# Altium PCB PCB1.pcbdoc (part 3 of 3)
Units mil, origin at the board's own origin, x right, y up, seen from the top; angles counter-clockwise.
Board outline 3735 x 4815 mil, 4 copper layers (Top Layer, Inner1, Inner2, Bottom Layer); 129 components, 135 nets, 714 pads, 315 vias.
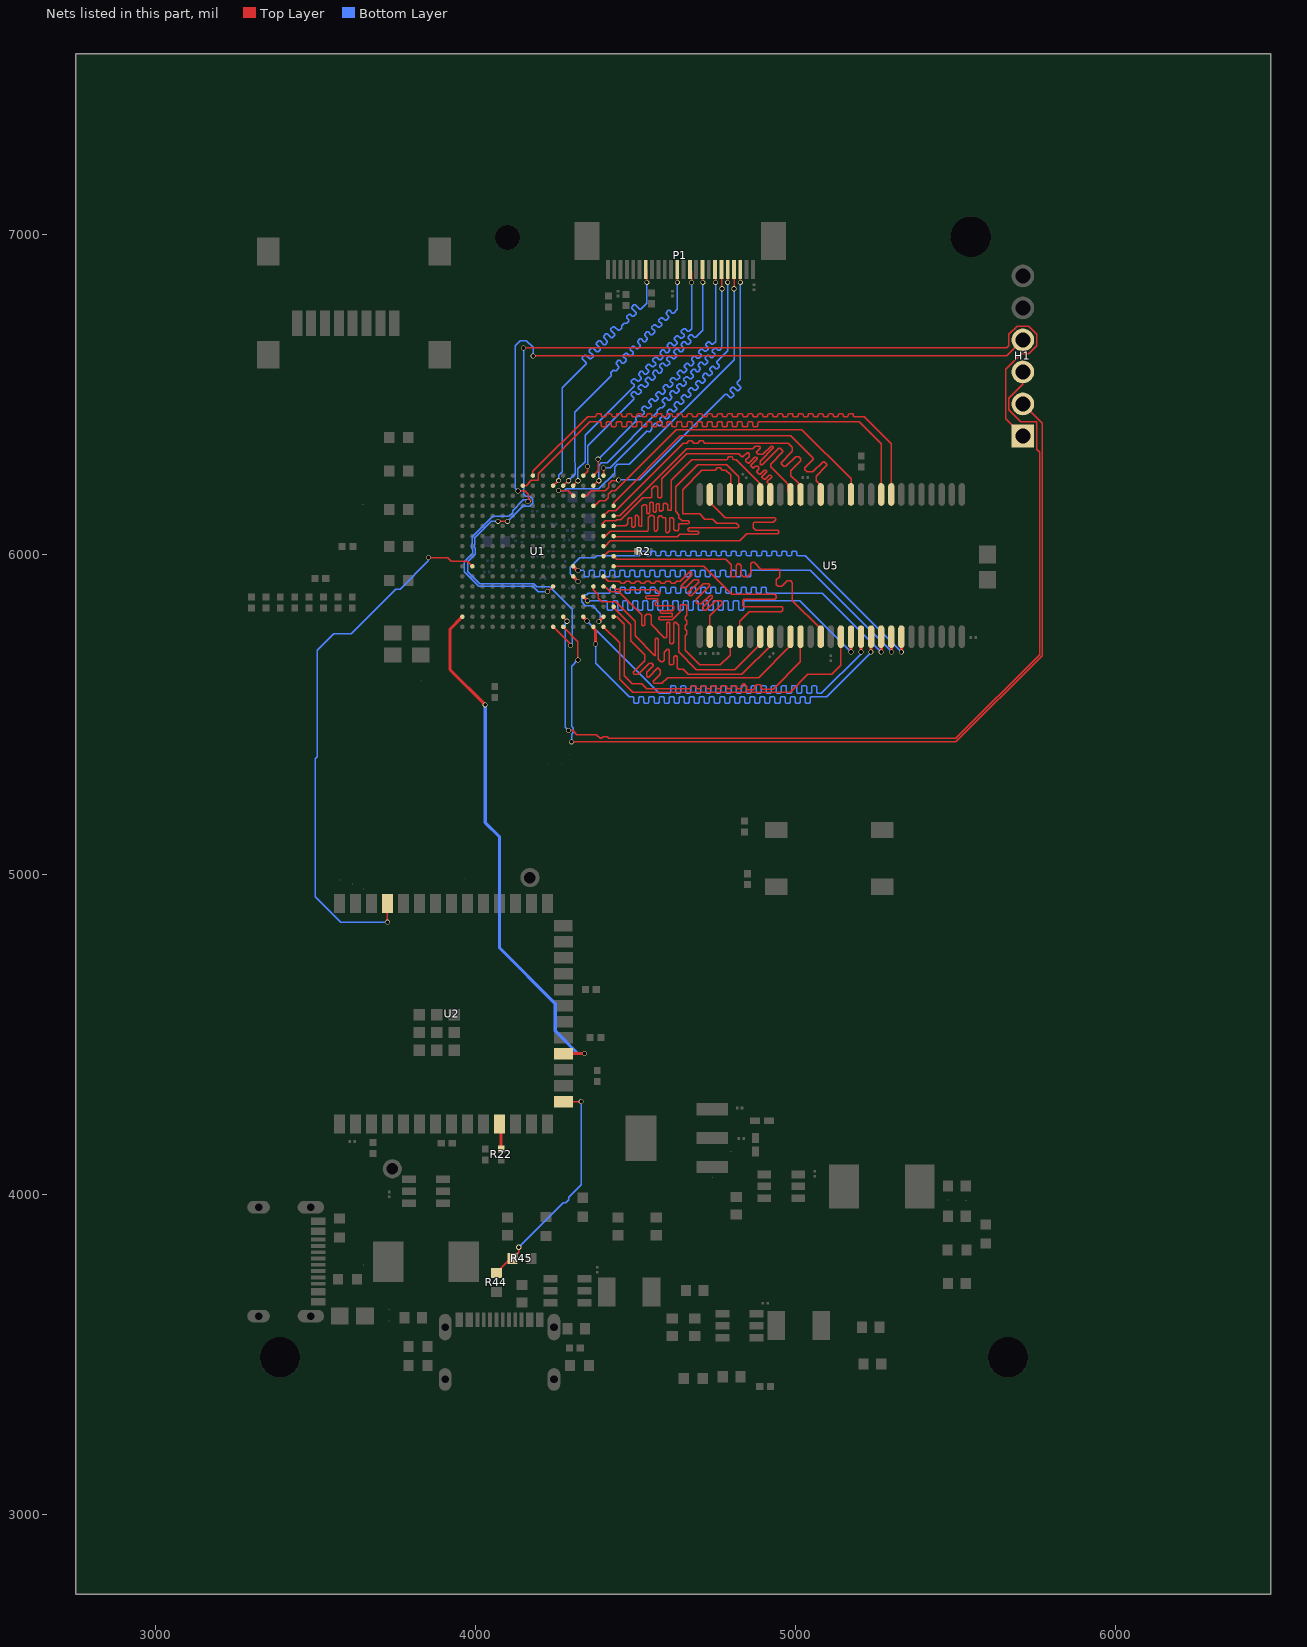
[diagram p5: the nets of this part, all layers, seen from the top]

## Via types
v1: diameter 15.75, hole 11.81, Top Layer to Bottom Layer, 309 vias
v2: diameter 39.37, hole 19.68, Top Layer to Bottom Layer, 6 vias

## Nets (pads, with @x,y where several pads share a name; then routed paths per layer and width w, separated by ;. In a path a pad name is that pad's centre, name@x,y a point inside that pad or via, vN(x,y) a via of type N, cw(c..) or ccw(c..) an arc to the next point about the centre after c; other vN are vias at no path point) (continued)
SD_A11: U1.A8 U5.35 | length 1747.6
  Top Layer w3.94: U1.A8@4179.25,6246.22 4179.25,6259.25 4350,6430 4374.84,6430 4377.62,6432.78 4377.62,6437.22 4380.41,6440 4390.59,6440 4393.37,6437.22 4393.37,6432.78 4396.16,6430 4406.34,6430 4409.12,6432.78 4409.12,6437.22 4411.9,6440 4422.09,6440 4424.87,6437.22 4424.87,6432.78 4427.65,6430 4437.83,6430 4440.62,6432.78 4440.62,6437.22 4443.4,6440 4453.58,6440 4456.37,6437.22 4456.37,6432.78 4459.15,6430 4469.33,6430 4472.11,6432.78 4472.11,6437.22 4474.9,6440 4485.08,6440 4487.86,6437.22 4487.86,6432.78 4490.65,6430 4500.83,6430 4503.61,6432.78 4503.61,6437.22 4506.39,6440 4516.57,6440 4519.36,6437.22 4519.36,6432.78 4522.14,6430 4532.32,6430 4535.11,6432.78 4535.11,6437.22 4537.89,6440 4548.07,6440 4550.85,6437.22 4550.85,6432.78 4553.64,6430 4563.82,6430 4566.6,6432.78 4566.6,6437.22 4569.39,6440 4579.57,6440 4582.35,6437.22 4582.35,6432.78 4585.13,6430 4595.31,6430 4598.1,6432.78 4598.1,6437.22 4600.88,6440 4611.06,6440 4613.85,6437.22 4613.85,6432.78 4616.63,6430 4626.81,6430 4629.59,6432.78 4629.59,6437.22 4632.38,6440 4642.56,6440 4645.34,6437.22 4645.34,6432.78 4648.13,6430 4658.31,6430 4661.09,6432.78 4661.09,6437.22 4663.87,6440 4674.05,6440 4676.84,6437.22 4676.84,6432.78 4679.62,6430 4689.8,6430 4692.59,6432.78 4692.59,6437.22 4695.37,6440 4705.55,6440 4708.33,6437.22 4708.33,6432.78 4711.12,6430 4721.3,6430 4724.08,6432.78 4724.08,6437.22 4726.87,6440 4737.05,6440 4739.83,6437.22 4739.83,6432.78 4742.61,6430 4752.79,6430 4755.58,6432.78 4755.58,6437.22 4758.36,6440 4768.54,6440 4771.33,6437.22 4771.33,6432.78 4774.11,6430 4784.29,6430 4787.07,6432.78 4787.07,6437.22 4789.86,6440 4800.04,6440 4802.82,6437.22 4802.82,6432.78 4805.61,6430 4815.79,6430 4818.57,6432.78 4818.57,6437.22 4821.35,6440 4831.53,6440 4834.32,6437.22 4834.32,6432.78 4837.1,6430 4847.28,6430 4850.07,6432.78 4850.07,6437.22 4852.85,6440 4863.03,6440 4865.81,6437.22 4865.81,6432.78 4868.6,6430 4878.78,6430 4881.56,6432.78 4881.56,6437.22 4884.35,6440 4894.53,6440 4897.31,6437.22 4897.31,6432.78 4900.09,6430 4910.27,6430 4913.06,6432.78 4913.06,6437.22 4915.84,6440 4926.02,6440 4928.81,6437.22 4928.81,6432.78 4931.59,6430 4941.77,6430 4944.55,6432.78 4944.55,6437.22 4947.34,6440 4957.52,6440 4960.3,6437.22 4960.3,6432.78 4963.09,6430 4973.27,6430 4976.05,6432.78 4976.05,6437.22 4978.83,6440 4989.01,6440 4991.8,6437.22 4991.8,6432.78 4994.58,6430 5004.76,6430 5007.55,6432.78 5007.55,6437.22 5010.33,6440 5020.51,6440 5023.29,6437.22 5023.29,6432.78 5026.08,6430 5036.26,6430 5039.04,6432.78 5039.04,6437.22 5041.83,6440 5052.01,6440 5054.79,6437.22 5054.79,6432.78 5057.57,6430 5067.75,6430 5070.54,6432.78 5070.54,6437.22 5073.32,6440 5083.5,6440 5086.29,6437.22 5086.29,6432.78 5089.07,6430 5099.25,6430 5102.03,6432.78 5102.03,6437.22 5104.82,6440 5115,6440 5117.78,6437.22 5117.78,6432.78 5120.57,6430 5130.75,6430 5133.53,6432.78 5133.53,6437.22 5136.31,6440 5146.49,6440 5149.28,6437.22 5149.28,6432.78 5152.06,6430 5162.24,6430 5165.03,6432.78 5165.03,6437.22 5167.81,6440 5177.99,6440 5180.77,6437.22 5180.77,6432.78 5183.56,6430 5215,6430 5298.98,6346.02 U5.35@5298.98,6187.13
SD_A12: U1.B7 U5.36 | length 1776.4
  Top Layer w3.94: U1.B7@4147.76,6214.72 4157.98,6214.72 4174.44,6231.18 4194.71,6231.18 4195.71,6232.18 4195.71,6252.45 4357.2,6413.94 4390.28,6413.94 4393.06,6411.15 4393.06,6401.72 4395.85,6398.94 4406.03,6398.94 4408.81,6401.72 4408.81,6411.15 4411.59,6413.94 4421.77,6413.94 4424.56,6411.15 4424.56,6401.72 4427.34,6398.94 4437.52,6398.94 4440.31,6401.72 4440.31,6411.15 4443.09,6413.94 4453.27,6413.94 4456.05,6411.15 4456.05,6401.72 4458.84,6398.94 4469.02,6398.94 4471.8,6401.72 4471.8,6411.15 4474.59,6413.94 4484.77,6413.94 4487.55,6411.15 4487.55,6401.72 4490.33,6398.94 4500.51,6398.94 4503.3,6401.72 4503.3,6411.15 4506.08,6413.94 4516.26,6413.94 4519.05,6411.15 4519.05,6401.72 4521.83,6398.94 4532.01,6398.94 4534.79,6401.72 4534.79,6411.15 4537.58,6413.94 4547.76,6413.94 4550.54,6411.15 4550.54,6401.72 4553.33,6398.94 4563.51,6398.94 4566.29,6401.72 4566.29,6411.15 4569.07,6413.94 4579.25,6413.94 4582.04,6411.15 4582.04,6401.72 4584.82,6398.94 4595,6398.94 4597.79,6401.72 4597.79,6411.15 4600.57,6413.94 4610.75,6413.94 4613.53,6411.15 4613.53,6401.72 4616.32,6398.94 4626.5,6398.94 4629.28,6401.72 4629.28,6411.15 4632.07,6413.94 4642.25,6413.94 4645.03,6411.15 4645.03,6401.72 4647.81,6398.94 4657.99,6398.94 4660.78,6401.72 4660.78,6411.15 4663.56,6413.94 4673.74,6413.94 4676.53,6411.15 4676.53,6401.72 4679.31,6398.94 4689.49,6398.94 4692.27,6401.72 4692.27,6411.15 4695.06,6413.94 4705.24,6413.94 4708.02,6411.15 4708.02,6401.72 4710.81,6398.94 4720.99,6398.94 4723.77,6401.72 4723.77,6411.15 4726.55,6413.94 4736.73,6413.94 4739.52,6411.15 4739.52,6401.72 4742.3,6398.94 4752.48,6398.94 4755.27,6401.72 4755.27,6411.15 4758.05,6413.94 4768.23,6413.94 4771.01,6411.15 4771.01,6401.72 4773.8,6398.94 4783.98,6398.94 4786.76,6401.72 4786.76,6411.15 4789.55,6413.94 4799.73,6413.94 4802.51,6411.15 4802.51,6401.72 4805.29,6398.94 4815.47,6398.94 4818.26,6401.72 4818.26,6411.15 4821.04,6413.94 4831.22,6413.94 4834.01,6411.15 4834.01,6401.72 4836.79,6398.94 4846.97,6398.94 4849.75,6401.72 4849.75,6411.15 4852.54,6413.94 4862.72,6413.94 4865.5,6411.15 4865.5,6401.72 4868.29,6398.94 4878.47,6398.94 4881.25,6401.72 4881.25,6411.15 4884.03,6413.94 5198.94,6413.94 5267.48,6345.39 U5.36@5267.48,6187.13
SD_BA0: U1.K12 U5.20 | length 1708.5
  Top Layer w10: U1.K12@4305.24,5962.76 4318.07,5949.93 v1(4319.93,5949.93) ; U5.20@5298.98,5742.87 5300,5741.85 v1(5300,5695)
  Bottom Layer w3.94: v1(4319.93,5949.93) 4337.3,5949.93 4340.08,5947.15 4340.08,5933.15 4342.87,5930.36 4353.05,5930.36 4355.83,5933.15 4355.83,5947.15 4358.61,5949.93 4368.79,5949.93 4371.58,5947.15 4371.58,5933.15 4374.36,5930.36 4384.54,5930.36 4387.33,5933.15 4387.33,5947.15 4390.11,5949.93 4400.29,5949.93 4403.07,5947.15 4403.07,5933.15 4405.86,5930.36 4416.04,5930.36 4418.82,5933.15 4418.82,5947.15 4421.61,5949.93 4431.79,5949.93 4434.57,5947.15 4434.57,5933.15 4437.35,5930.36 4447.53,5930.36 4450.32,5933.15 4450.32,5947.15 4453.1,5949.93 4463.28,5949.93 4466.07,5947.15 4466.07,5933.15 4468.85,5930.36 4479.03,5930.36 4481.81,5933.15 4481.81,5947.15 4484.6,5949.93 4494.78,5949.93 4497.56,5947.15 4497.56,5933.15 4500.35,5930.36 4510.53,5930.36 4513.31,5933.15 4513.31,5947.15 4516.09,5949.93 4526.27,5949.93 4529.06,5947.15 4529.06,5933.15 4531.84,5930.36 4542.02,5930.36 4544.81,5933.15 4544.81,5947.15 4547.59,5949.93 4557.77,5949.93 4560.55,5947.15 4560.55,5933.15 4563.34,5930.36 4573.52,5930.36 4576.3,5933.15 4576.3,5947.15 4579.09,5949.93 4589.27,5949.93 4592.05,5947.15 4592.05,5933.15 4594.83,5930.36 4605.01,5930.36 4607.8,5933.15 4607.8,5947.15 4610.58,5949.93 4620.76,5949.93 4623.55,5947.15 4623.55,5933.15 4626.33,5930.36 4636.51,5930.36 4639.29,5933.15 4639.29,5947.15 4642.08,5949.93 4652.26,5949.93 4655.04,5947.15 4655.04,5933.15 4657.83,5930.36 4668.01,5930.36 4670.79,5933.15 4670.79,5947.15 4673.57,5949.93 4683.75,5949.93 4686.54,5947.15 4686.54,5933.15 4689.32,5930.36 4699.5,5930.36 4702.29,5933.15 4702.29,5947.15 4705.07,5949.93 4715.25,5949.93 4718.03,5947.15 4718.03,5933.15 4720.82,5930.36 4731,5930.36 4733.78,5933.15 4733.78,5947.15 4736.57,5949.93 4746.75,5949.93 4749.53,5947.15 4749.53,5933.15 4752.31,5930.36 4762.49,5930.36 4765.28,5933.15 4765.28,5947.15 4768.06,5949.93 4778.24,5949.93 4781.03,5947.15 4781.03,5933.15 4783.81,5930.36 4793.99,5930.36 4796.77,5933.15 4796.77,5947.15 4799.56,5949.93 4809.74,5949.93 4812.52,5947.15 4812.52,5933.15 4815.31,5930.36 4825.49,5930.36 4828.27,5933.15 4828.27,5947.15 4831.05,5949.93 4841.23,5949.93 4844.02,5947.15 4844.02,5933.15 4846.8,5930.36 4856.98,5930.36 4859.77,5933.15 4859.77,5947.15 4862.55,5949.93 5045.07,5949.93 v1(5300,5695)
SD_BA1: U1.L12 U5.21 | length 1673.6
  Top Layer w10: U1.L12@4305.24,5931.26 4320,5916.5 v1(4320,5915) ; v1(5330.47,5695) U5.21@5330.47,5742.87
  Bottom Layer w3.94: v1(4320,5915) 4296.23,5938.77 4296.23,5959.75 4325.38,5988.89 4372.34,5988.89 4378.44,5995 4512.89,5995 4515.67,5997.78 4515.67,6007.22 4518.46,6010 4528.64,6010 4531.42,6007.22 4531.42,5997.78 4534.2,5995 4544.38,5995 4547.17,5997.78 4547.17,6007.22 4549.95,6010 4560.13,6010 4562.92,6007.22 4562.92,5997.78 4565.7,5995 4575.88,5995 4578.66,5997.78 4578.66,6007.22 4581.45,6010 4591.63,6010 4594.41,6007.22 4594.41,5997.78 4597.2,5995 4607.38,5995 4610.16,5997.78 4610.16,6007.22 4612.94,6010 4623.12,6010 4625.91,6007.22 4625.91,5997.78 4628.69,5995 4638.87,5995 4641.66,5997.78 4641.66,6007.22 4644.44,6010 4654.62,6010 4657.4,6007.22 4657.4,5997.78 4660.19,5995 4670.37,5995 4673.15,5997.78 4673.15,6007.22 4675.94,6010 4686.12,6010 4688.9,6007.22 4688.9,5997.78 4691.68,5995 4701.86,5995 4704.65,5997.78 4704.65,6007.22 4707.43,6010 4717.61,6010 4720.4,6007.22 4720.4,5997.78 4723.18,5995 4733.36,5995 4736.14,5997.78 4736.14,6007.22 4738.93,6010 4749.11,6010 4751.89,6007.22 4751.89,5997.78 4754.68,5995 4764.86,5995 4767.64,5997.78 4767.64,6007.22 4770.42,6010 4780.6,6010 4783.39,6007.22 4783.39,5997.78 4786.17,5995 4796.35,5995 4799.14,5997.78 4799.14,6007.22 4801.92,6010 4812.1,6010 4814.88,6007.22 4814.88,5997.78 4817.67,5995 4827.85,5995 4830.63,5997.78 4830.63,6007.22 4833.42,6010 4843.6,6010 4846.38,6007.22 4846.38,5997.78 4849.16,5995 4859.34,5995 4862.13,5997.78 4862.13,6007.22 4864.91,6010 4875.09,6010 4877.88,6007.22 4877.88,5997.78 4880.66,5995 4890.84,5995 4893.62,5997.78 4893.62,6007.22 4896.41,6010 4906.59,6010 4909.37,6007.22 4909.37,5997.78 4912.16,5995 4922.34,5995 4925.12,5997.78 4925.12,6007.22 4927.9,6010 4938.08,6010 4940.87,6007.22 4940.87,5997.78 4943.65,5995 4953.83,5995 4956.62,5997.78 4956.62,6007.22 4959.4,6010 4969.58,6010 4972.36,6007.22 4972.36,5997.78 4975.15,5995 4985.33,5995 4988.11,5997.78 4988.11,6007.22 4990.9,6010 5001.08,6010 5003.86,6007.22 5003.86,5997.78 5006.64,5995 5030.47,5995 v1(5330.47,5695)
SD_CAS_N: U1.R13 U5.17 | length 1697.4
  Top Layer w10: U1.R13@4336.73,5805.28 4336.73,5803.4 v1(4348.09,5792.04) ; v1(5204.49,5695) U5.17@5204.49,5742.87
  Bottom Layer w3.94: v1(4348.09,5792.04) 4574.22,5565.91 4606.49,5565.91 4609.28,5568.69 4609.28,5587.22 4612.06,5590 4622.24,5590 4625.03,5587.22 4625.03,5568.69 4627.81,5565.91 4637.99,5565.91 4640.77,5568.69 4640.77,5587.22 4643.56,5590 4653.74,5590 4656.52,5587.22 4656.52,5568.69 4659.31,5565.91 4669.49,5565.91 4672.27,5568.69 4672.27,5587.22 4675.05,5590 4685.23,5590 4688.02,5587.22 4688.02,5568.69 4690.8,5565.91 4700.98,5565.91 4703.77,5568.69 4703.77,5587.22 4706.55,5590 4716.73,5590 4719.51,5587.22 4719.51,5568.69 4722.3,5565.91 4732.48,5565.91 4735.26,5568.69 4735.26,5587.22 4738.05,5590 4748.23,5590 4751.01,5587.22 4751.01,5568.69 4753.79,5565.91 4763.97,5565.91 4766.76,5568.69 4766.76,5587.22 4769.54,5590 4779.72,5590 4782.51,5587.22 4782.51,5568.69 4785.29,5565.91 4795.47,5565.91 4798.25,5568.69 4798.25,5587.22 4801.04,5590 4811.22,5590 4814,5587.22 4814,5568.69 4816.79,5565.91 4826.97,5565.91 4829.75,5568.69 4829.75,5587.22 4832.53,5590 4842.71,5590 4845.5,5587.22 4845.5,5568.69 4848.28,5565.91 4858.46,5565.91 4861.25,5568.69 4861.25,5587.22 4864.03,5590 4874.21,5590 4876.99,5587.22 4876.99,5568.69 4879.78,5565.91 4889.96,5565.91 4892.74,5568.69 4892.74,5587.22 4895.53,5590 4905.71,5590 4908.49,5587.22 4908.49,5568.69 4911.27,5565.91 4921.45,5565.91 4924.24,5568.69 4924.24,5587.22 4927.02,5590 4937.2,5590 4939.99,5587.22 4939.99,5568.69 4942.77,5565.91 4952.95,5565.91 4955.73,5568.69 4955.73,5587.22 4958.52,5590 4968.7,5590 4971.48,5587.22 4971.48,5568.69 4974.27,5565.91 4984.45,5565.91 4987.23,5568.69 4987.23,5587.22 4990.01,5590 5000.19,5590 5002.98,5587.22 5002.98,5568.69 5005.76,5565.91 5015.94,5565.91 5018.73,5568.69 5018.73,5587.22 5021.51,5590 5031.69,5590 5034.47,5587.22 5034.47,5568.69 5037.26,5565.91 5047.44,5565.91 5050.22,5568.69 5050.22,5587.22 5053.01,5590 5063.19,5590 5065.97,5587.22 5065.97,5568.69 5068.75,5565.91 5080.57,5565.91 5204.49,5689.83 v1(5204.49,5695)
SD_CLK: R2.2 U1.J15 | length 114.8
  Top Layer w3.94: U1.J15@4399.72,5994.25 4415.47,6010 R2.2@4507.96,6010
SD_CS_N: U1.R15 U5.19 | length 1692.7
  Top Layer w10: v1(4385,5790) 4399.72,5804.72 U1.R15@4399.72,5805.28 ; v1(5267.48,5695) U5.19@5267.48,5742.87
  Bottom Layer w3.94: v1(4385,5790) 4390,5790 4390,5815 4365.83,5839.17 4343.44,5839.17 4331.14,5851.48 4331.14,5862.81 4342.19,5873.86 4347.19,5873.86 4352.19,5878.86 4417.55,5878.86 4420.33,5881.64 4420.33,5894.62 4423.12,5897.4 4433.3,5897.4 4436.08,5894.62 4436.08,5881.64 4438.86,5878.86 4449.04,5878.86 4451.83,5881.64 4451.83,5894.62 4454.61,5897.4 4464.79,5897.4 4467.58,5894.62 4467.58,5881.64 4470.36,5878.86 4480.54,5878.86 4483.32,5881.64 4483.32,5894.62 4486.11,5897.4 4496.29,5897.4 4499.07,5894.62 4499.07,5881.64 4501.86,5878.86 4512.04,5878.86 4514.82,5881.64 4514.82,5894.62 4517.6,5897.4 4527.78,5897.4 4530.57,5894.62 4530.57,5881.64 4533.35,5878.86 4543.53,5878.86 4546.32,5881.64 4546.32,5894.62 4549.1,5897.4 4559.28,5897.4 4562.06,5894.62 4562.06,5881.64 4564.85,5878.86 4575.03,5878.86 4577.81,5881.64 4577.81,5894.62 4580.6,5897.4 4590.78,5897.4 4593.56,5894.62 4593.56,5881.64 4596.34,5878.86 4606.52,5878.86 4609.31,5881.64 4609.31,5894.62 4612.09,5897.4 4622.27,5897.4 4625.06,5894.62 4625.06,5881.64 4627.84,5878.86 4638.02,5878.86 4640.8,5881.64 4640.8,5894.62 4643.59,5897.4 4653.77,5897.4 4656.55,5894.62 4656.55,5881.64 4659.34,5878.86 4669.52,5878.86 4672.3,5881.64 4672.3,5894.62 4675.08,5897.4 4685.26,5897.4 4688.05,5894.62 4688.05,5881.64 4690.83,5878.86 4701.01,5878.86 4703.8,5881.64 4703.8,5894.62 4706.58,5897.4 4716.76,5897.4 4719.54,5894.62 4719.54,5881.64 4722.33,5878.86 4732.51,5878.86 4735.29,5881.64 4735.29,5894.62 4738.08,5897.4 4748.26,5897.4 4751.04,5894.62 4751.04,5881.64 4753.82,5878.86 4764,5878.86 4766.79,5881.64 4766.79,5894.62 4769.57,5897.4 4779.75,5897.4 4782.54,5894.62 4782.54,5881.64 4785.32,5878.86 4795.5,5878.86 4798.28,5881.64 4798.28,5894.62 4801.07,5897.4 4811.25,5897.4 4814.03,5894.62 4814.03,5881.64 4816.82,5878.86 4827,5878.86 4829.78,5881.64 4829.78,5894.62 4832.56,5897.4 4842.74,5897.4 4845.53,5894.62 4845.53,5881.64 4848.31,5878.86 4858.49,5878.86 4861.28,5881.64 4861.28,5894.62 4864.06,5897.4 4874.24,5897.4 4877.02,5894.62 4877.02,5881.64 4879.81,5878.86 4889.99,5878.86 4892.77,5881.64 4892.77,5894.62 4895.56,5897.4 4905.74,5897.4 4908.52,5894.62 4908.52,5881.64 4911.3,5878.86 5082.81,5878.86 5261.67,5700 5262.48,5700 v1(5267.48,5695)
SD_DQ0: U1.L15 U5.2 | length 983.7
  Top Layer w3.94: U1.L15@4399.72,5931.26 4414.76,5916.22 4448.89,5916.22 4451.68,5913.44 4451.68,5912.78 4454.46,5910 4464.64,5910 4467.42,5912.78 4467.42,5913.44 4470.21,5916.22 4480.39,5916.22 4483.17,5913.44 4483.17,5912.78 4485.96,5910 4496.14,5910 4498.92,5912.78 4498.92,5913.44 4501.7,5916.22 4511.88,5916.22 4514.67,5913.44 4514.67,5912.78 4517.45,5910 4527.63,5910 4530.42,5912.78 4530.42,5913.44 4533.2,5916.22 4543.38,5916.22 4546.16,5913.44 4546.16,5912.78 4548.95,5910 4559.13,5910 4561.91,5912.78 4561.91,5913.44 4564.7,5916.22 4574.88,5916.22 4577.66,5913.44 4577.66,5912.78 4580.44,5910 4590.62,5910 4593.41,5912.78 4593.41,5913.44 4596.19,5916.22 4606.37,5916.22 4609.16,5913.44 4609.16,5912.78 4611.94,5910 4622.12,5910 4624.9,5912.78 4624.9,5913.44 4627.69,5916.22 4639.5,5916.22 4669.43,5946.15 4673.85,5946.15 4675,5945 4675,5935 4642.6,5902.6 4642.6,5897.4 4645,5895 4656.84,5895 4681.84,5920 4694.03,5920 4696.81,5917.22 4696.81,5913.28 4665,5881.47 4665,5875 4670,5870 4673.57,5870 4711.35,5907.78 4729.27,5907.78 4732.05,5905 4732.05,5901.29 4690,5859.24 4690,5850 4695,5845 4705,5845 4732.78,5872.78 4737.22,5872.78 4740,5870 4740,5864 4710,5834 4710,5830 4715,5825 4720,5825 4750,5855 4765.66,5855 4770.41,5850.25 4770.41,5846.31 4732.05,5807.95 U5.2@4732.05,5747.87
SD_DQ1: U1.M16 U5.4 | length 983
  Top Layer w3.94: U1.M16@4431.22,5899.76 4439.72,5891.26 4449.98,5891.26 4451.49,5889.76 4565.24,5889.76 4577.1,5877.9 4570.35,5871.15 4535,5871.15 4532.22,5868.37 4532.22,5864.43 4535,5861.65 4568.35,5861.65 4570,5860 4570,5854.55 4562.22,5846.76 4562.22,5842.82 4565,5840.04 4614.96,5840.04 4619.18,5835.82 4619.18,5829.18 4614.18,5824.18 4580,5824.18 4577.44,5821.62 4577.44,5818.01 4580,5815.45 4614.96,5815.45 4614.96,5806.24 4614.28,5805.57 4575,5805.57 4572.22,5802.78 4572.22,5798.85 4575,5796.06 4614.96,5796.06 4640,5821.1 4640,5840 4642.78,5842.78 4657.22,5842.78 4660,5840 4660,5810 4655,5805 4655,5796.97 4659.73,5792.24 4659.73,5781.22 4655,5776.49 4655,5765.47 4659.73,5760.75 4659.73,5749.73 4655,5745 4655,5700 4700,5655 4765,5655 4795.04,5685.04 U5.4@4795.04,5747.87
SD_DQ2: U1.K16 U5.5 | length 1006.3
  Top Layer w3.94: U1.K16@4431.22,5962.76 4712.24,5962.76 4800,5875 4935,5875 4940,5870 4940,5865 4934.35,5859.35 4838.64,5859.35 4834.29,5855 4834.29,5839.08 4836.64,5836.72 4957.22,5836.72 4960,5833.94 4960,5825 4955.04,5820.04 4855.04,5820.04 4825.87,5790.87 4825.87,5758.54 4826.54,5757.87 U5.5@4826.54,5747.87
SD_DQ3: U1.M15 U5.7 | length 978.3
  Top Layer w3.94: U1.M15@4399.72,5899.76 4402.86,5899.76 4403.44,5899.17 4405.31,5899.17 4421.17,5883.31 4446.69,5883.31 4519.4,5810.6 4519.4,5780 4522.18,5777.22 4526.12,5777.22 4528.9,5780 4528.9,5806.64 4535,5812.74 4545,5812.74 4548.94,5808.81 4548.94,5781.06 4590,5740 4595,5740 4597.28,5742.28 4597.28,5785 4600.06,5787.78 4604,5787.78 4606.78,5785 4606.78,5723.22 4610,5720 4615,5720 4619.87,5724.87 4619.87,5785 4622.19,5787.32 4625.47,5787.32 4634.22,5778.56 4634.22,5695.78 4690,5640 4810.2,5640 4883.86,5713.65 4883.86,5737.2 4884.53,5737.87 4884.53,5742.87 U5.7@4889.53,5747.87
SD_DQ4: U1.M14 U5.8 | length 1016.4
  Top Layer w3.94: U1.M14@4368.23,5899.76 4368.23,5889.54 4383.27,5874.5 4383.27,5863.45 4394.91,5851.81 4437.45,5851.81 4498.95,5790.31 4498.95,5745 4560.28,5683.67 4561.53,5684.93 4561.53,5735 4564.32,5737.78 4568.26,5737.78 4571.04,5735 4571.04,5672.91 4578.95,5665 4585,5665 4589.68,5669.68 4589.68,5694.19 4598.28,5702.78 4602.22,5702.78 4605,5700 4605,5658.94 4608.94,5655 4615,5655 4618.63,5658.63 4618.63,5678.13 4623.28,5682.78 4627.22,5682.78 4630,5680 4630,5645.88 4635,5640.88 4648.38,5640.88 4664.26,5625 4832.42,5625 4927.2,5719.79 4927.2,5741.69 U5.8@4921.02,5747.87
SD_DQ5: U1.P16 U5.10 | length 1006.4
  Top Layer w3.94: U1.P16@4431.22,5836.77 4431.22,5832.48 4484.19,5779.51 4484.19,5730.81 4528.81,5686.19 4528.81,5668.32 4492.22,5631.72 4492.22,5627.78 4495,5625 4507.6,5625 4542.6,5660 4550,5660 4555,5655 4555,5652.41 4534.5,5631.91 4534.5,5619.5 4537.29,5616.72 4541.23,5616.72 4569.75,5645.25 4576.4,5638.6 4576.4,5625.9 4554.72,5604.22 4554.72,5600.28 4557.5,5597.5 4582.5,5597.5 4600,5615 4884.69,5615 4984.02,5714.33 U5.10@4984.02,5747.87
SD_DQ6: U1.R16 U5.11 | length 990.6
  Top Layer w3.94: U1.R16@4431.22,5805.28 4441.61,5805.28 4465,5781.89 4465,5620 4489.86,5595.14 4519.86,5595.14 4535.63,5579.37 4671.13,5579.37 4673.91,5582.15 4673.91,5587.22 4676.69,5590 4686.87,5590 4689.66,5587.22 4689.66,5582.15 4692.44,5579.37 4702.62,5579.37 4705.41,5582.15 4705.41,5587.22 4708.19,5590 4718.37,5590 4721.15,5587.22 4721.15,5582.15 4723.94,5579.37 4734.12,5579.37 4736.9,5582.15 4736.9,5587.22 4739.69,5590 4749.87,5590 4752.65,5587.22 4752.65,5582.15 4755.43,5579.37 4765.62,5579.37 4768.4,5582.15 4768.4,5587.22 4771.18,5590 4781.36,5590 4784.15,5587.22 4784.15,5582.15 4786.93,5579.37 4797.11,5579.37 4799.9,5582.15 4799.9,5587.22 4802.68,5590 4812.86,5590 4815.64,5587.22 4815.64,5582.15 4818.43,5579.37 4829.34,5579.37 4833.28,5583.3 4833.28,5592.22 4836.06,5595 4840,5595 4848.12,5586.88 4848.12,5577 4868.28,5577 4872.22,5580.94 4872.22,5587.22 4877.22,5592.22 4890,5592.22 4892.78,5589.43 4892.78,5582.11 4896.72,5578.17 4929.44,5578.17 5015,5663.73 U5.11@5015,5727.99
SD_DQ7: U1.J16 U5.13 | length 993.5
  Top Layer w3.94: U1.J16@4431.22,5994.25 4440.47,5985 4781.09,5985 4798.28,5967.78 4798.28,5932.29 4801.06,5929.5 4810.57,5929.5 4814.5,5933.44 4814.5,5965 4819.88,5970.37 4824.63,5970.37 4830.07,5964.93 4830.07,5935.99 4836.56,5929.5 4849.5,5929.5 4860.64,5940.64 4860.64,5970.64 4865,5975 4870.64,5975 4893,5952.64 4893.14,5952.78 4947.22,5952.78 4950,5950 4950,5930.36 4940,5920.36 4940,5905.64 4945.64,5900 4957.31,5900 4974.46,5917.15 4985,5917.15 4990.1,5912.06 4990.1,5855.58 ; 4990.08,5855.56 5078.5,5767.14 U5.13@5078.5,5747.87
SD_DQ8: U1.D16 U5.42 | length 993.1
  Top Layer w3.94: U1.D16@4431.22,6151.73 4431.22,6161.73 4639.49,6370 4985,6370 5055,6300 5055,6296.81 5029.18,6270.99 5029.18,6265 5036.57,6257.62 5053.68,6257.62 5086.06,6290 5090,6290 5097.78,6282.22 5097.78,6277.78 5095,6275 5094.76,6275 5064.18,6244.42 5064.18,6230 5073.5,6220.68 5073.5,6197.13 U5.42@5078.5,6192.13
SD_DQ9: U1.E15 U5.44 | length 985.5
  Top Layer w3.94: U1.E15@4399.72,6120.24 4416.17,6136.69 4437.45,6136.69 4648.26,6347.5 4660.07,6347.5 4662.85,6350.28 4662.85,6352.22 4665.64,6355 4675.82,6355 4678.6,6352.22 4678.6,6350.28 4681.39,6347.5 4694.97,6347.5 4697.76,6350.28 4697.76,6352.22 4700.54,6355 4710.72,6355 4713.51,6352.22 4713.51,6350.28 4716.29,6347.5 4977.5,6347.5 4990,6335 4990,6321.65 4955,6286.65 4955,6282.39 4962.39,6275 4970,6275 5000,6305 5010,6305 5016.67,6298.33 5016.67,6292.76 4985,6261.1 4985,6246.19 5008.01,6223.18 5008.01,6199.63 U5.44@5015.51,6192.13
SD_DQ10: U1.E16 U5.45 | length 982.3
  Top Layer w3.94: U1.E16@4431.22,6120.24 4450.24,6120.24 4660,6330 4865.41,6330 4873.19,6337.78 4887.22,6337.78 4890,6335 4890,6331.62 4876.9,6318.51 4883.12,6312.28 4897.78,6312.28 4923.28,6337.78 4927.22,6337.78 4930,6335 4930,6332.38 4888.81,6291.19 4888.81,6282.25 4891.59,6279.47 4895.53,6279.47 4948.03,6331.97 4951.97,6331.97 4960,6323.94 4960,6320 4922.18,6282.18 4922.18,6273.23 4970.32,6225.09 4970.32,6224.89 4975.59,6219.61 4975.59,6196.07 4979.53,6192.13 U5.45@4984.02,6192.13
SD_DQ11: U1.F15 U5.47 | length 987.3
  Top Layer w3.94: U1.F15@4399.72,6088.74 4394.72,6093.74 4394.72,6094.72 4405.2,6105.2 4437.45,6105.2 4441.03,6108.78 4453.78,6108.78 4522.22,6177.22 4547.22,6177.22 4550,6180 4550,6205 4558.01,6213.01 4566.06,6213.01 4570,6209.07 4570,6180 4572.78,6177.22 4578.66,6177.22 4581.45,6180 4581.45,6236.45 4660,6315 4821.7,6315 4831.94,6304.77 4835.26,6304.77 4848.28,6317.78 4852.22,6317.78 4855,6315 4855,6305 4845,6295 4845,6291.7 4852.31,6284.4 4854.4,6284.4 4872.78,6302.78 4877.22,6302.78 4880,6300 4880,6298.25 4860,6278.25 4860,6276.7 4867.86,6268.85 4874.01,6275 4882.51,6275 4885,6272.51 4885,6266.23 4878.77,6260 4878.77,6257.93 4886.7,6250 4890,6250 4902.78,6262.78 4907.22,6262.78 4910,6260 4910,6258.08 4895,6243.08 4895,6241.7 4902.68,6234.02 4904.52,6234.02 4918.28,6247.78 4922.22,6247.78 4925,6245 4925,6241.13 4911.7,6227.83 4911.7,6225 4921.02,6215.68 U5.47@4921.02,6192.13
SD_DQ12: U1.F16 U5.48 | length 986.3
  Top Layer w3.94: U1.F16@4431.22,6088.74 4468.74,6088.74 4475,6095 4475,6110 4480,6115 4486.56,6115 4488.28,6113.28 4488.28,6087.78 4491.06,6085 4495,6085 4499.27,6089.27 4499.27,6119.27 4501.54,6121.54 4505,6121.54 4510.32,6116.22 4510.32,6090.18 4513.28,6087.22 4517.22,6087.22 4520,6090 4520,6150 4525,6155 4532.34,6155 4535.5,6151.84 4535.5,6130 4538.28,6127.22 4540.97,6127.22 4545,6131.25 4545,6159.82 4547.47,6162.29 4552.71,6162.29 4555.5,6159.5 4555.5,6135 4558.28,6132.22 4562.22,6132.22 4565,6135 4565,6155 4567.53,6157.53 4572.47,6157.53 4573.86,6156.14 4573.86,6137.2 4576.64,6134.42 4580.58,6134.42 4586.16,6140 4586.16,6156.16 4590,6160 4595,6160 4600,6155 4600,6140 4602.78,6137.22 4609.43,6137.22 4612.21,6140 4612.21,6232.21 4675,6295 4785.58,6295 4788.36,6297.78 4788.36,6302.22 4791.14,6305 4801.32,6305 4804.11,6302.22 4804.11,6297.78 4806.89,6295 4815,6295 4887.22,6222.78 4887.22,6196.07 4889.53,6193.76 U5.48@4889.53,6192.13
SD_DQ13: U1.G15 U5.50 | length 986.5
  Top Layer w3.94: U1.G15@4399.72,6057.24 4405.29,6057.24 4420.33,6072.28 4537.28,6072.28 4540,6075 4540,6115 4547.22,6122.22 4552.78,6122.22 4557.78,6117.22 4557.78,6075 4560.57,6072.22 4564.5,6072.22 4570,6077.71 4570,6115 4575,6120 4580,6120 4585,6115 4593.52,6115 4593.52,6070 4596.3,6067.22 4600.24,6067.22 4606.51,6073.49 4606.51,6112.77 4608.74,6115 4615,6115 4620,6110 4620,6077.87 4623.94,6073.94 4631.06,6073.94 4635,6077.87 4635,6093.36 4636.64,6095 4665,6095 4667.78,6097.78 4667.78,6101.72 4664.7,6104.81 4645.19,6104.81 4635,6115 4635,6124.5 4625.46,6134.05 4625.46,6210.69 4694.76,6280 4785,6280 4821.88,6243.12 4821.88,6196.79 U5.50@4826.54,6192.13
SD_DQ14: U1.G16 U5.51 | length 983.1
  Top Layer w3.94: U1.G16@4431.22,6057.24 4433.72,6054.74 4629.74,6054.74 4637.36,6062.36 4695,6062.36 4697.78,6065.15 4697.78,6069.08 4695,6071.87 4668.13,6071.87 4663.69,6076.31 4663.69,6078.69 4667.43,6082.43 4820,6082.43 4822.78,6085.21 4822.78,6089.15 4814.15,6097.78 4753.28,6097.78 4741.06,6110 4716.51,6110 4700,6126.51 4646.87,6126.51 4646.87,6201.87 4707.5,6262.5 4749.37,6262.5 4752.16,6265.28 4752.16,6268.19 4754.94,6270.97 4765.12,6270.97 4767.91,6268.19 4767.91,6265.28 4770.69,6262.5 4782.5,6262.5 4796.87,6248.13 4796.87,6205.3 U5.51@4797.54,6204.63
SD_DQ15: U1.H15 U5.53 | length 996.9
  Top Layer w3.94: U1.H15@4399.72,6025.75 4404.72,6025.75 4421.17,6042.2 4826.14,6042.2 4848.08,6064.14 4943.65,6064.14 4947.78,6068.28 4947.78,6072.22 4945,6075 4875,6075 4867.22,6082.78 4867.22,6097.22 4870,6100 4929.5,6100 4937.78,6108.28 4937.78,6112.22 4935,6115 4780,6115 4737.05,6157.95 U5.53@4737.05,6187.13
SD_DQM0: U1.T15 U5.15 | length 1017.6
  Top Layer w3.94: U1.T15@4399.72,5773.78 4450,5723.49 4450,5610 4490.87,5569.13 4982.81,5569.13 5038.68,5625 5113.44,5625 5141.5,5653.06 U5.15@5141.5,5742.87
SD_DQM1: U1.D14 U5.39 | length 1020
  Top Layer w3.94: U1.D14@4368.23,6151.73 4371.73,6151.73 4388.19,6168.19 4405.95,6168.19 4414.76,6177 4414.76,6188.04 4424.99,6198.27 4436.04,6198.27 4627.77,6390 5019.39,6390 5173.34,6236.05 5173.34,6197.13 U5.39@5168.34,6192.13
SD_RAS_N: U1.T14 U5.18 | length 1722.8
  Top Layer w10: U1.T14@4370,5767.24 4375,5762.24 v1(4375,5720) ; v1(5235,5695) 5235.98,5695.98 U5.18@5235.98,5742.87
  Bottom Layer w3.94: v1(4375,5720) 4375,5660 4480,5555 4491.81,5555 4494.59,5552.22 4494.59,5537.78 4497.38,5535 4507.56,5535 4510.34,5537.78 4510.34,5552.22 4513.13,5555 4523.31,5555 4526.09,5552.22 4526.09,5537.78 4528.87,5535 4539.06,5535 4541.84,5537.78 4541.84,5552.22 4544.62,5555 4554.8,5555 4557.59,5552.22 4557.59,5537.78 4560.37,5535 4570.55,5535 4573.34,5537.78 4573.34,5552.22 4576.12,5555 4586.3,5555 4589.08,5552.22 4589.08,5537.78 4591.87,5535 4602.05,5535 4604.83,5537.78 4604.83,5552.22 4607.61,5555 4617.8,5555 4620.58,5552.22 4620.58,5537.78 4623.36,5535 4633.54,5535 4636.33,5537.78 4636.33,5552.22 4639.11,5555 4649.29,5555 4652.08,5552.22 4652.08,5537.78 4654.86,5535 4665.04,5535 4667.82,5537.78 4667.82,5552.22 4670.61,5555 4680.79,5555 4683.57,5552.22 4683.57,5537.78 4686.36,5535 4696.54,5535 4699.32,5537.78 4699.32,5552.22 4702.1,5555 4712.28,5555 4715.07,5552.22 4715.07,5537.78 4717.85,5535 4728.03,5535 4730.82,5537.78 4730.82,5552.22 4733.6,5555 4743.78,5555 4746.56,5552.22 4746.56,5537.78 4749.35,5535 4759.53,5535 4762.31,5537.78 4762.31,5552.22 4765.1,5555 4775.28,5555 4778.06,5552.22 4778.06,5537.78 4780.84,5535 4791.02,5535 4793.81,5537.78 4793.81,5552.22 4796.59,5555 4806.77,5555 4809.56,5552.22 4809.56,5537.78 4812.34,5535 4822.52,5535 4825.3,5537.78 4825.3,5552.22 4828.09,5555 4838.27,5555 4841.05,5552.22 4841.05,5537.78 4843.84,5535 4854.02,5535 4856.8,5537.78 4856.8,5552.22 4859.58,5555 4869.76,5555 4872.55,5552.22 4872.55,5537.78 4875.33,5535 4885.51,5535 4888.3,5537.78 4888.3,5552.22 4891.08,5555 4901.26,5555 4904.04,5552.22 4904.04,5537.78 4906.83,5535 4917.01,5535 4919.79,5537.78 4919.79,5552.22 4922.58,5555 4932.76,5555 4935.54,5552.22 4935.54,5537.78 4938.32,5535 4948.5,5535 4951.29,5537.78 4951.29,5552.22 4954.07,5555 4964.25,5555 4967.04,5552.22 4967.04,5537.78 4969.82,5535 4980,5535 4982.78,5537.78 4982.78,5552.22 4985.57,5555 4995.75,5555 4998.53,5552.22 4998.53,5537.78 5001.32,5535 5011.5,5535 5014.28,5537.78 5014.28,5552.22 5017.06,5555 5027.24,5555 5030.03,5552.22 5030.03,5537.78 5032.81,5535 5042.99,5535 5045.78,5537.78 5045.78,5552.22 5048.56,5555 5096.87,5555 5235,5693.13 v1(5235,5695)
SD_WE_N: U1.N13 U5.16 | length 1704.6
  Top Layer w10: U1.N13@4336.73,5868.27 v1(4350,5855) ; v1(5172.99,5695) U5.16@5172.99,5742.87
  Bottom Layer w3.94: v1(4350,5855) 4409.38,5855 4412.16,5852.22 4412.16,5827.78 4414.95,5825 4425.13,5825 4427.91,5827.78 4427.91,5852.22 4430.69,5855 4440.87,5855 4443.66,5852.22 4443.66,5827.78 4446.44,5825 4456.62,5825 4459.41,5827.78 4459.41,5852.22 4462.19,5855 4472.37,5855 4475.15,5852.22 4475.15,5827.78 4477.94,5825 4488.12,5825 4490.9,5827.78 4490.9,5852.22 4493.69,5855 4503.87,5855 4506.65,5852.22 4506.65,5827.78 4509.43,5825 4519.61,5825 4522.4,5827.78 4522.4,5852.22 4525.18,5855 4535.36,5855 4538.15,5852.22 4538.15,5827.78 4540.93,5825 4551.11,5825 4553.89,5827.78 4553.89,5852.22 4556.68,5855 4566.86,5855 4569.64,5852.22 4569.64,5827.78 4572.43,5825 4582.61,5825 4585.39,5827.78 4585.39,5852.22 4588.17,5855 4598.35,5855 4601.14,5852.22 4601.14,5827.78 4603.92,5825 4614.1,5825 4616.89,5827.78 4616.89,5852.22 4619.67,5855 4629.85,5855 4632.64,5852.22 4632.64,5827.78 4635.42,5825 4645.6,5825 4648.38,5827.78 4648.38,5852.22 4651.17,5855 4661.35,5855 4664.13,5852.22 4664.13,5827.78 4666.91,5825 4677.1,5825 4679.88,5827.78 4679.88,5852.22 4682.66,5855 4692.84,5855 4695.63,5852.22 4695.63,5827.78 4698.41,5825 4708.59,5825 4711.38,5827.78 4711.38,5852.22 4714.16,5855 4724.34,5855 4727.12,5852.22 4727.12,5827.78 4729.91,5825 4740.09,5825 4742.87,5827.78 4742.87,5852.22 4745.66,5855 4755.84,5855 4758.62,5852.22 4758.62,5827.78 4761.4,5825 4771.58,5825 4774.37,5827.78 4774.37,5852.22 4777.15,5855 4787.33,5855 4790.12,5852.22 4790.12,5827.78 4792.9,5825 4803.08,5825 4805.86,5827.78 4805.86,5852.22 4808.65,5855 4818.83,5855 4821.61,5852.22 4821.61,5827.78 4824.4,5825 4834.58,5825 4837.36,5827.78 4837.36,5852.22 4840.14,5855 5012.99,5855 v1(5172.99,5695)
SDA: R22.1 U2.11 | length 75.5
  Top Layer w10: R22.1@4079.8,4145 U2.11@4079.8,4220.51
SSPI_CS_N: U1.R1 U2.18 | length 1626.8
  Top Layer w10: U1.R1@3958.78,5805.28 3920,5766.5 3920,5640 v1(4030,5530) ; U2.18@4280.19,4440 v1(4340,4440)
  Bottom Layer w10: v1(4030,5530) 4030,5161.75 4075,5116.75 4075,4770 4248.94,4596.06 4248.94,4511.06 4320,4440 v1(4340,4440)
TCK: H1.1 U1.T10 | length 3482.3
  Top Layer w3.94: v1(4069.84,6103.4) 4078.15,6103.4 4078.53,6103.78 4090.99,6103.78 4091.37,6103.4 4098.4,6103.4 v1@4100,6105 ; v1(4150,6645) 5659.36,6645 5666.61,6652.25 5666.61,6687.97 5692.03,6713.39 5727.97,6713.39 5753.39,6687.97 5753.39,6652.03 5727.97,6626.61 5705.26,6626.61 5656.74,6578.1 5656.74,6423.26 H1.1@5710,6370 ; U1.T10@4242.24,5773.78 4296.73,5719.29 v1(4296.73,5715)
  Bottom Layer w3.94: v1(4069.84,6103.4) 4049.53,6103.4 3998.22,6052.09 3998.22,6030.18 3996.28,6028.25 3996.28,6022.23 3998.7,6019.82 3998.7,6000.18 3975,5976.48 3975,5946.14 4013.26,5907.87 4182.51,5907.87 4190.91,5899.47 4231.56,5899.47 4301.9,5829.13 4301.9,5720.16 v1(4296.73,5715) ; v1(4100,6103.4) 4150,6153.4 4153.33,6153.4 4156.95,6149.78 4170.06,6149.78 4179.33,6159.05 4179.33,6172.16 4170.06,6181.43 4156.95,6181.43 4150,6188.38 v1(4150,6645)
TDI: H1.3 U1.R11 | length 2931.3
  Top Layer w3.94: U1.R11@4273.74,5805.28 4273.74,5803.4 v1(4286.07,5791.07) ; v1(4290,5450) 4302.92,5450 4315.8,5437.13 4376.81,5437.13 4388.94,5425 4393.44,5425 4398.44,5430 4411.56,5430 4416.56,5425 5500,5425 5762.13,5687.13 5762.13,6319.63 5753.74,6328.01 5753.74,6415.12 5703.52,6415.12 5666.61,6452.03 5666.61,6487.97 5710,6531.36 H1.3@5710,6570
  Bottom Layer w3.94: v1(4286.07,5791.07) 4280.91,5785.91 4280.91,5459.09 v1(4290,5450)
TDO: H1.4 U1.M10 | length 2836.6
  Top Layer w3.94: v1(4132.49,6197.58) 4140.85,6197.58 4141.53,6198.27 4153.99,6198.27 4164.21,6188.04 4164.21,6177 4173.02,6168.19 4173.02,6166.77 4171.86,6165.61 v1(4163.51,6165.61) ; v1(4180,6620) 5660,6620 H1.4@5710,6670 ; v1(4225,5883.64) 4226.12,5883.64 U1.M10@4242.24,5899.76
  Bottom Layer w3.94: v1(4132.49,6197.58) 4124.17,6205.91 4124.17,6652.2 4139.92,6667.95 4158.87,6667.95 4180,6646.82 v1(4180,6620) ; v1(4163.51,6165.61) 4158.5,6170.61 4149.47,6170.61 4115.83,6136.96 4115.83,6130.79 4104.26,6119.22 4054.22,6119.22 3990.35,6055.35 3990.35,6033.44 3988.41,6031.51 3988.41,6018.97 3990.83,6016.56 3990.83,6003.44 3965,5977.62 3965,5945 4010,5900 4179.25,5900 4195.61,5883.64 v1(4225,5883.64)
TMS: H1.2 U1.T11 | length 2784.6
  Top Layer w3.94: U1.T11@4273.74,5773.78 4320,5727.52 v1(4320,5670) ; v1(4300,5414.17) 5500.31,5414.17 5770,5683.86 5770,6410 H1.2@5710,6470
  Bottom Layer w3.94: v1(4300,5414.17) 4300,5437.62 4305.83,5443.44 4305.83,5456.56 4300,5462.38 4300,5650 v1(4320,5670)
TX: U1.K2 U2.37 | length 1715.7
  Top Layer w3.94: v1@3724.8,4850 U2.37@3724.8,4909.49 ; v1@3850,5990 3912.62,5990 3923.44,5979.17 3973.79,5979.17 ; 3973.83,5979.21 U1.K2@3990.28,5962.76
  Bottom Layer w3.94: v1(3724.8,4850.83) 3579.17,4850.83 3499.09,4930.91 3499.09,5361.19 3505,5367.09 3505,5700 3557.13,5752.13 3611.14,5752.13 3750.32,5891.3 3764.82,5891.3 3852.95,5979.43 v1(3852.95,5990)
USB_VBUS: R44.1 R45.2 U2.15 | length 707.4
  Top Layer w3.94: R44.1@4065,3754.66 4110.34,3800 R45.2@4115.34,3800 4135,3819.66 v1(4135,3835) ; U2.15@4275.19,4290 v1(4330,4290)
  Bottom Layer w3.94: v1(4135,3835) 4273.83,3973.83 4281.56,3973.83 4290.83,3983.1 4290.83,3990.83 4330,4030 v1(4330,4290)
VSYNC: P1.7 U1.B10 | length 1065.2
  Top Layer w3.94: U1.B10@4242.24,6214.72 4257.82,6230.3 v1(4259.7,6230.3) ; P1.7@4531.9,6890.56 4535,6887.47 v1(4535,6850)
  Bottom Layer w3.94: v1(4259.7,6230.3) 4259.7,6247.32 4270.83,6258.44 4270.83,6520.83 4345.44,6595.44 4345.44,6599.37 4333.27,6611.55 4333.27,6615.48 4340.46,6622.68 4344.4,6622.68 4356.57,6610.51 4360.51,6610.51 4367.71,6617.71 4367.71,6621.65 4355.54,6633.82 4355.54,6637.75 4362.74,6644.95 4366.67,6644.95 4378.84,6632.78 4382.78,6632.78 4389.98,6639.98 4389.98,6643.92 4377.81,6656.09 4377.81,6660.02 4385.01,6667.22 4388.94,6667.22 4401.11,6655.05 4405.05,6655.05 4412.25,6662.25 4412.25,6666.19 4400.08,6678.36 4400.08,6682.3 4407.28,6689.49 4411.21,6689.49 4423.39,6677.32 4427.32,6677.32 4434.52,6684.52 4434.52,6688.46 4422.35,6700.63 4422.35,6704.57 4429.55,6711.77 4433.49,6711.77 4445.66,6699.59 4449.59,6699.59 4456.94,6706.94 4456.94,6714.52 4464.28,6721.86 4471.86,6721.86 4479.06,6729.06 4479.06,6733 4472.53,6739.54 4472.53,6743.47 4479.73,6750.67 4483.66,6750.67 4490.2,6744.14 4494.14,6744.14 4501.33,6751.33 4501.33,6755.27 4487.77,6768.83 4487.77,6772.77 4494.97,6779.97 4498.91,6779.97 4512.47,6766.41 4516.41,6766.41 4535,6785 v1(4535,6850)
Y2: P1.19 U1.B14 | length 1063
  Top Layer w3.94: U1.B14@4368.23,6214.72 4383.51,6230 v1(4385,6230) ; P1.19@4768.1,6890.56 4770,6888.65 v1(4770,6830)
  Bottom Layer w3.94: v1(4385,6230) 4385,6262.62 4384.17,6263.44 4384.17,6276.56 4393.44,6285.83 4410.83,6285.83 4568.48,6443.48 4568.48,6450 4576.36,6457.87 4582.87,6457.87 4591.36,6466.36 4591.36,6470.3 4583.96,6477.7 4583.96,6481.64 4591.16,6488.84 4595.1,6488.84 4602.5,6481.44 4606.44,6481.44 4613.63,6488.63 4613.63,6492.57 4606.23,6499.97 4606.23,6503.91 4613.43,6511.11 4617.37,6511.11 4624.77,6503.71 4628.71,6503.71 4635.9,6510.9 4635.9,6514.84 4628.5,6522.24 4628.5,6526.18 4635.7,6533.38 4639.64,6533.38 4647.04,6525.98 4650.98,6525.98 4658.18,6533.18 4658.18,6537.11 4650.77,6544.51 4650.77,6548.45 4657.97,6555.65 4661.91,6555.65 4669.31,6548.25 4673.25,6548.25 4680.45,6555.45 4680.45,6559.38 4673.05,6566.79 4673.05,6570.72 4680.24,6577.92 4684.18,6577.92 4691.58,6570.52 4695.52,6570.52 4702.72,6577.72 4702.72,6581.65 4695.32,6589.06 4695.32,6592.99 4702.52,6600.19 4706.45,6600.19 4713.85,6592.79 4717.79,6592.79 4724.99,6599.99 4724.99,6603.93 4717.59,6611.33 4717.59,6615.26 4724.79,6622.46 4728.72,6622.46 4736.12,6615.06 4740.06,6615.06 4747.26,6622.26 4747.26,6626.2 4739.86,6633.6 4739.86,6637.54 4747.06,6644.73 4750.99,6644.73 4758.4,6637.33 4762.33,6637.33 4770,6645 v1(4770,6830)
Y3: P1.21 U1.C12 | length 1062.7
  Top Layer w3.94: v1(4259.45,6199.41) 4289.06,6199.41 U1.C12@4305.24,6183.23 ; v1(4807.56,6830) P1.21@4807.56,6890.44
  Bottom Layer w3.94: v1(4259.45,6199.41) 4277.14,6199.41 4283.4,6205.67 4385.67,6205.67 4434.17,6254.17 4434.17,6271.56 4443.44,6280.83 4480.83,6280.83 4807.56,6607.56 v1(4807.56,6830)
Y4: P1.22 U1.C13 | length 1062.8
  Top Layer w3.94: U1.C13@4336.73,6183.23 4346.96,6183.23 4362,6198.27 4404.54,6198.27 4416.18,6209.91 4416.18,6220.95 4424.99,6229.76 4444.38,6229.76 v1(4447.31,6232.69) ; v1(4827.23,6850) P1.22@4827.23,6890.44
  Bottom Layer w3.94: v1(4447.31,6232.69) 4512.69,6232.69 4780.2,6500.2 4784.14,6500.2 4795.2,6489.14 4799.14,6489.14 4806.34,6496.34 4806.34,6500.27 4795.27,6511.34 4795.27,6515.27 4802.47,6522.47 4806.41,6522.47 4817.47,6511.41 4821.41,6511.41 4828.61,6518.61 4828.61,6522.55 4817.55,6533.61 4817.55,6537.55 4827.23,6547.23 v1(4827.23,6850)
Y5: P1.20 U1.A15 | length 1063.7
  Top Layer w3.94: U1.A15@4399.72,6246.22 4400,6246.5 v1(4400,6270) ; v1(4787.86,6850) P1.20@4787.86,6890.44
  Bottom Layer w3.94: v1(4400,6270) 4421.48,6270 4535.56,6384.08 4539.5,6384.08 4539.82,6383.76 4543.76,6383.76 4550.96,6390.96 4550.96,6394.9 4550.64,6395.22 4550.64,6399.15 4560.88,6409.4 4564.82,6409.4 4572.64,6401.57 4576.57,6401.57 4583.77,6408.77 4583.77,6412.71 4575.95,6420.53 4575.95,6424.47 4583.15,6431.67 4587.09,6431.67 4594.91,6423.85 4598.85,6423.85 4606.04,6431.04 4606.04,6434.98 4598.22,6442.8 4598.22,6446.74 4605.42,6453.94 4609.36,6453.94 4617.18,6446.12 4621.12,6446.12 4628.32,6453.32 4628.32,6457.25 4620.49,6465.07 4620.49,6469.01 4627.69,6476.21 4631.63,6476.21 4639.45,6468.39 4643.39,6468.39 4650.59,6475.59 4650.59,6479.52 4642.76,6487.35 4642.76,6491.28 4649.96,6498.48 4653.9,6498.48 4661.72,6490.66 4665.66,6490.66 4672.86,6497.86 4672.86,6501.79 4665.04,6509.62 4665.04,6513.55 4672.23,6520.75 4676.17,6520.75 4683.99,6512.93 4687.93,6512.93 4695.13,6520.13 4695.13,6524.07 4687.31,6531.89 4687.31,6535.82 4694.51,6543.02 4698.44,6543.02 4706.26,6535.2 4710.2,6535.2 4717.4,6542.4 4717.4,6546.34 4709.58,6554.16 4709.58,6558.1 4716.78,6565.29 4720.71,6565.29 4728.54,6557.47 4732.47,6557.47 4739.67,6564.67 4739.67,6568.61 4731.85,6576.43 4731.85,6580.37 4739.05,6587.57 4742.98,6587.57 4750.81,6579.74 4754.74,6579.74 4761.94,6586.94 4761.94,6590.88 4754.12,6598.7 4754.12,6602.64 4787.86,6636.38 v1(4787.86,6850)
Y6: P1.18 U1.A14 | length 1065.4
  Top Layer w3.94: U1.A14@4368.23,6246.22 4382.62,6260.61 v1(4382.62,6297.38) ; P1.18@4748.41,6890.56 4750,6888.98 v1(4750,6850)
  Bottom Layer w3.94: v1(4382.62,6297.38) 4502.23,6417 4502.23,6420.94 4500.44,6422.73 4500.44,6426.67 4507.64,6433.87 4511.57,6433.87 4513.37,6432.07 4517.31,6432.07 4526.32,6441.09 4526.32,6445.02 4519.02,6452.32 4519.02,6456.26 4526.22,6463.46 4530.16,6463.46 4537.46,6456.16 4541.39,6456.16 4548.59,6463.36 4548.59,6467.29 4541.29,6474.59 4541.29,6478.53 4548.49,6485.73 4552.43,6485.73 4559.73,6478.43 4563.66,6478.43 4570.86,6485.63 4570.86,6489.56 4563.57,6496.86 4563.57,6500.8 4570.76,6508 4574.7,6508 4582,6500.7 4585.94,6500.7 4593.13,6507.9 4593.13,6511.84 4585.84,6519.13 4585.84,6523.07 4593.03,6530.27 4596.97,6530.27 4604.27,6522.97 4608.21,6522.97 4615.4,6530.17 4615.4,6534.11 4608.11,6541.4 4608.11,6545.34 4615.31,6552.54 4619.24,6552.54 4626.54,6545.24 4630.48,6545.24 4637.68,6552.44 4637.68,6556.38 4630.38,6563.68 4630.38,6567.61 4637.58,6574.81 4641.51,6574.81 4648.81,6567.51 4652.75,6567.51 4659.95,6574.71 4659.95,6578.65 4652.65,6585.95 4652.65,6589.88 4659.85,6597.08 4663.79,6597.08 4671.08,6589.78 4675.02,6589.78 4682.22,6596.98 4682.22,6600.92 4674.92,6608.22 4674.92,6612.15 4682.12,6619.35 4686.06,6619.35 4693.35,6612.06 4697.29,6612.06 4704.49,6619.25 4704.49,6623.19 4697.19,6630.49 4697.19,6634.43 4704.39,6641.62 4708.33,6641.62 4715.62,6634.33 4719.56,6634.33 4726.76,6641.53 4726.76,6645.46 4719.46,6652.76 4719.46,6656.7 4726.66,6663.9 4730.6,6663.9 4737.9,6656.6 4741.83,6656.6 4750,6664.77 v1(4750,6850)
Y7: P1.16 U1.A13 | length 1058.8
  Top Layer w3.94: U1.A13@4336.73,6246.22 4350,6259.49 v1(4350,6275) ; P1.16@4709.05,6890.53 4710,6889.57 v1(4710,6850)
  Bottom Layer w3.94: v1(4350,6275) 4350,6340 4494.8,6484.8 4494.8,6488.74 4486.24,6497.3 4486.24,6501.24 4493.44,6508.44 4497.38,6508.44 4505.94,6499.88 4509.88,6499.88 4517.07,6507.07 4517.07,6511.01 4508.51,6519.57 4508.51,6523.51 4515.71,6530.71 4519.65,6530.71 4528.21,6522.15 4532.15,6522.15 4539.35,6529.35 4539.35,6533.28 4530.78,6541.85 4530.78,6545.78 4537.98,6552.98 4541.92,6552.98 4550.48,6544.42 4554.42,6544.42 4561.62,6551.62 4561.62,6555.55 4553.05,6564.12 4553.05,6568.05 4560.25,6575.25 4564.19,6575.25 4572.75,6566.69 4576.69,6566.69 4583.89,6573.89 4583.89,6577.83 4575.33,6586.39 4575.33,6590.33 4582.52,6597.52 4586.46,6597.52 4595.02,6588.96 4598.96,6588.96 4606.16,6596.16 4606.16,6600.1 4597.6,6608.66 4597.6,6612.6 4604.79,6619.79 4608.73,6619.79 4617.29,6611.23 4621.23,6611.23 4628.43,6618.43 4628.43,6622.37 4619.87,6630.93 4619.87,6634.87 4627.07,6642.07 4631,6642.07 4639.57,6633.5 4643.5,6633.5 4650.7,6640.7 4650.7,6644.64 4642.14,6653.2 4642.14,6657.14 4649.34,6664.34 4653.27,6664.34 4661.84,6655.77 4665.77,6655.77 4672.97,6662.97 4672.97,6666.91 4664.41,6675.47 4664.41,6679.41 4671.61,6686.61 4675.54,6686.61 4684.11,6678.04 4688.04,6678.04 4710,6700 v1(4710,6850)
Y8: P1.14 U1.B12 | length 1061.7
  Top Layer w3.94: U1.B12@4305.24,6214.72 4320,6229.48 v1(4320,6230) ; P1.14@4669.7,6890.56 4674.86,6885.41 v1(4674.86,6849.86)
  Bottom Layer w3.94: v1(4320,6230) 4320,6267.38 4342.13,6289.51 4342.13,6372.13 4495.59,6525.59 4495.59,6529.52 4487.02,6538.09 4487.02,6542.02 4494.22,6549.22 4498.16,6549.22 4506.72,6540.66 4510.66,6540.66 4518.28,6548.28 4518.28,6552.21 4509.71,6560.78 4509.71,6564.71 4516.91,6571.91 4520.85,6571.91 4529.41,6563.35 4533.35,6563.35 4540.55,6570.55 4540.55,6574.49 4531.99,6583.05 4531.99,6586.99 4539.18,6594.18 4543.12,6594.18 4551.68,6585.62 4555.62,6585.62 4562.82,6592.82 4562.82,6596.76 4554.26,6605.32 4554.26,6609.26 4561.46,6616.46 4565.39,6616.46 4573.96,6607.89 4577.89,6607.89 4585.09,6615.09 4585.09,6619.03 4576.53,6627.59 4576.53,6631.53 4583.73,6638.73 4587.66,6638.73 4596.23,6630.16 4600.16,6630.16 4607.36,6637.36 4607.36,6641.3 4598.8,6649.86 4598.8,6653.8 4606,6661 4609.93,6661 4618.5,6652.43 4622.43,6652.43 4629.63,6659.63 4629.63,6663.57 4621.07,6672.13 4621.07,6676.07 4628.27,6683.27 4632.21,6683.27 4640.77,6674.71 4644.71,6674.71 4651.9,6681.9 4651.9,6685.84 4643.34,6694.4 4643.34,6698.34 4650.54,6705.54 4654.48,6705.54 4663.04,6696.98 4666.98,6696.98 4674.86,6704.86 v1(4674.86,6849.86)
Y9: P1.12 U1.B11 | length 1064.8
  Top Layer w3.94: U1.B11@4273.74,6214.72 4289.02,6230 v1(4290,6230) ; v1(4630.34,6850) P1.12@4630.34,6890.56
  Bottom Layer w3.94: v1(4290,6230) 4312.13,6252.13 4312.13,6285.49 4309.17,6288.44 4309.17,6444.17 4423.82,6558.82 4423.82,6562.76 4422.76,6563.82 4422.76,6567.76 4429.96,6574.96 4433.9,6574.96 4434.96,6573.9 4438.9,6573.9 4447.81,6582.81 4447.81,6586.74 4439.24,6595.31 4439.24,6599.24 4446.44,6606.44 4450.38,6606.44 4458.94,6597.88 4462.88,6597.88 4470.08,6605.08 4470.08,6609.02 4461.52,6617.58 4461.52,6621.52 4468.71,6628.71 4472.65,6628.71 4481.21,6620.15 4485.15,6620.15 4492.35,6627.35 4492.35,6631.29 4483.79,6639.85 4483.79,6643.79 4490.98,6650.98 4494.92,6650.98 4503.48,6642.42 4507.42,6642.42 4514.62,6649.62 4514.62,6653.56 4506.06,6662.12 4506.06,6666.06 4513.26,6673.26 4517.19,6673.26 4525.76,6664.69 4529.69,6664.69 4536.89,6671.89 4536.89,6675.83 4528.33,6684.39 4528.33,6688.33 4535.53,6695.53 4539.46,6695.53 4548.03,6686.96 4551.96,6686.96 4559.16,6694.16 4559.16,6698.1 4550.6,6706.66 4550.6,6710.6 4557.8,6717.8 4561.73,6717.8 4570.3,6709.23 4574.23,6709.23 4581.43,6716.43 4581.43,6720.37 4572.87,6728.93 4572.87,6732.87 4580.07,6740.07 4584.01,6740.07 4592.57,6731.51 4596.51,6731.51 4603.7,6738.7 4603.7,6742.64 4595.14,6751.2 4595.14,6755.14 4602.34,6762.34 4606.28,6762.34 4614.84,6753.78 4618.78,6753.78 4630.34,6765.34 v1(4630.34,6850)
pads on no net: P1.1 P1.10 SCREW1.1 SCREW2.1 SCREW3.1 SCREW4.1 U1.A9 U1.B3 U1.B8 U1.B13 U1.B15 U1.B16 U1.C1 U1.C2 U1.C3 U1.C4 U1.C5 U1.C6 U1.C9 U1.C10 U1.C11 U1.C14 U1.C15 U1.C16 U1.D1 U1.D3 U1.D4 U1.D5 U1.D6 U1.D7 U1.D8 U1.D9 U1.D10 U1.D11 U1.D12 U1.D13 U1.E3 U1.E4 U1.E5 U1.E6 U1.E7 U1.E8 U1.E9 U1.E10 U1.E11 U1.E12 U1.E13 U1.E14 U1.F3 U1.F4 U1.F5 U1.F12 U1.F13 U1.F14 U1.G3 U1.G4 U1.G5 U1.G12 U1.G13 U1.G14 U1.H2 U1.H3 U1.H4 U1.H5 U1.H12 U1.H13 U1.H14 U1.J3 U1.J4 U1.J5 U1.J12 U1.J13 U1.K3 U1.K4 U1.K5 U1.K13 U1.K14 U1.K15 U1.L1 U1.L2 U1.L3 U1.L4 U1.L5 U1.L13 U1.L14 U1.L16 U1.M2 U1.M3 U1.M4 U1.M5 U1.M6 U1.M7 U1.M9 U1.M11 U1.M12 U1.M13 U1.N1 U1.N3 U1.N4 U1.N5 U1.N6 U1.N7 U1.N8 U1.N9 U1.N11 U1.N12 U1.N14 U1.N16 U1.P1 U1.P2 U1.P3 U1.P4 U1.P5 U1.P6 U1.P7 U1.P8 U1.P11 U1.P12 U1.P13 U1.P14 U1.P15 U1.R2 U1.R3 U1.R4 U1.R5 U1.R6 U1.R7 U1.R8 U1.R12 U1.R14 U1.T13 U2.4 U2.16 U2.26 U2.28 U2.29 U2.30 U2.32 U2.33 U2.34 U2.35 U2.38 U2.39 U5.40 U8.4 USB1.A6 USB1.A7 USB1.A8 USB1.B6 USB1.B7 USB1.B8 USB2.A8 USB2.B6 USB2.B7 USB2.B8
copper on no net: | length 801.5
  Top Layer w3.94: 3615,4970 3624.8,4960.19 3624.8,4909.49 ; 3650,4955 3674.8,4930.19 3674.8,4909.49 ; 3724.8,4220.51 3733.81,4211.51 v1(3733.81,4156.19) ; 4074.8,4909.49 4074.8,4934.49 4135.31,4995 4160,4995 4170,4985 ; v1(4260.05,5824.95) 4261.97,5825 4273.74,5836.77
  Top Layer w10: v1(3925,5838.03) 3957.52,5838.03 3958.78,5836.77 ; v1(3931.76,5936.76) 3937.26,5931.26 3958.78,5931.26 ; v1(3935,5870) 3957.05,5870 3958.78,5868.27 ; v1(3974.41,5854.27) 3990.28,5838.4 3990.28,5836.77 ; v1(4005.84,5850.84) 4005.84,5852.34 4021.77,5868.27 ; v1(4035.65,5821.02) 4037.53,5821.02 4053.27,5836.77 ; v1(4040,5855) 4053.27,5868.27 ; v1@4069.09,5819.09 4069.09,5821.1 4084.76,5836.77 ; v1(4070,5855) 4071.49,5855 4084.76,5868.27 ; v1@4100,5855 4102.99,5855 4116.26,5868.27 ; v1(4103.18,5821.82) 4116.26,5834.9 4116.26,5836.77 ; v1@4130,5850 4130,5850.51 4147.76,5868.27
  Bottom Layer w3.94: v1(3733.81,4156.19) 3740,4150 3740,4080 ; v1(3885,5931.73) 3926.73,5931.73 v1(3931.76,5936.76) ; v1(4260.05,5824.95) 4275,5810 4275,5805
  other v1: 4069.01,5819.16 4131.33,5851.33 4100.56,5854.44

## Polygon pours and split planes (outlines as drawn)
+3V3 on Inner2 "Inner2-+3V3" (solid, remove dead copper, pour order 0): 3000,7310 6235,7310 6235,3000 3000,3000
GND on Inner1 "Inner1-GND" (solid, remove dead copper, pour order 1): 3055,7315 6010,7315 6010,3215 3055,3215

## Keep-outs
Board Outline Layer:
  lines w10: 3265,3369.84 5784.69,3369.84 5784.69,7110 3265,7110 3265,3369.84

## Other copper
Top Layer:
  region net GND: 3564.91,4990.58 3584.91,4990.58 3584.91,4974.79 3564.7,4974.79 3564.91,4974.99
  region net GND: 3640.1,3787.9 3660.1,3787.9 3660.1,3772.1 3639.9,3772.1 3640.1,3772.31
  region net GND: 3720.1,3612.9 3740.1,3612.9 3740.1,3597.1 3719.9,3597.1 3720.1,3597.31
  region net +5V: 3719.35,3648.64 3739.35,3648.64 3739.35,3632.85 3719.15,3632.85 3719.35,3633.05
  region net +1V8: 4788.15,4141.44 4808.15,4141.44 4808.15,4125.64 4787.95,4125.64 4788.15,4125.85
  region net GND: 4729.86,4061.51 4749.86,4061.51 4749.86,4045.71 4729.65,4045.71 4729.86,4045.91
  region net GND: 5521.84,3989.05 5541.84,3989.05 5541.84,3973.26 5521.64,3973.26 5521.84,3973.46
  region net +3V3: 3638.9,6163.73 3658.9,6163.73 3658.9,6147.94 3638.69,6147.94 3638.9,6148.14
  region net GND: 3820.1,5612.9 3840.1,5612.9 3840.1,5597.1 3819.9,5597.1 3820.1,5597.31
  region net +1V1: 5466.72,3990.59 5486.72,3990.59 5486.72,3974.8 5466.52,3974.8 5466.72,3975
  region: 3605.1,4977.9 3625.1,4977.9 3625.1,4962.1 3604.9,4962.1 3605.1,4962.31
  region: 3640.1,4962.9 3660.1,4962.9 3660.1,4947.1 3639.9,4947.1 3640.1,4947.31
Bottom Layer:
  region net DONE: 4285.1,5382.9 4305.1,5382.9 4305.1,5367.1 4284.9,5367.1 4285.1,5367.31
  region net PROGRAMN: 4215.1,5352.06 4235.1,5352.06 4235.1,5336.27 4214.9,5336.27 4215.1,5336.47
  region net INITN: 3955.1,4992.9 3975.1,4992.9 3975.1,4977.1 3954.9,4977.1 3955.1,4977.31
  region net GND: 4260.1,5352.9 4280.1,5352.9 4280.1,5337.1 4259.9,5337.1 4260.1,5337.31
  region: 4262.48,5811.89 4279.8,5821.89 4287.7,5808.21 4270.2,5798.11 4270.28,5798.39

## Silkscreen, mask and mechanical layers (free items; w line width, h text height)
Top Silkscreen Layer:
  text "JTAG" at 5635.82,6523.27 h120 r90